# EAGLE board programmer shield (EAGLE 7.3.0)
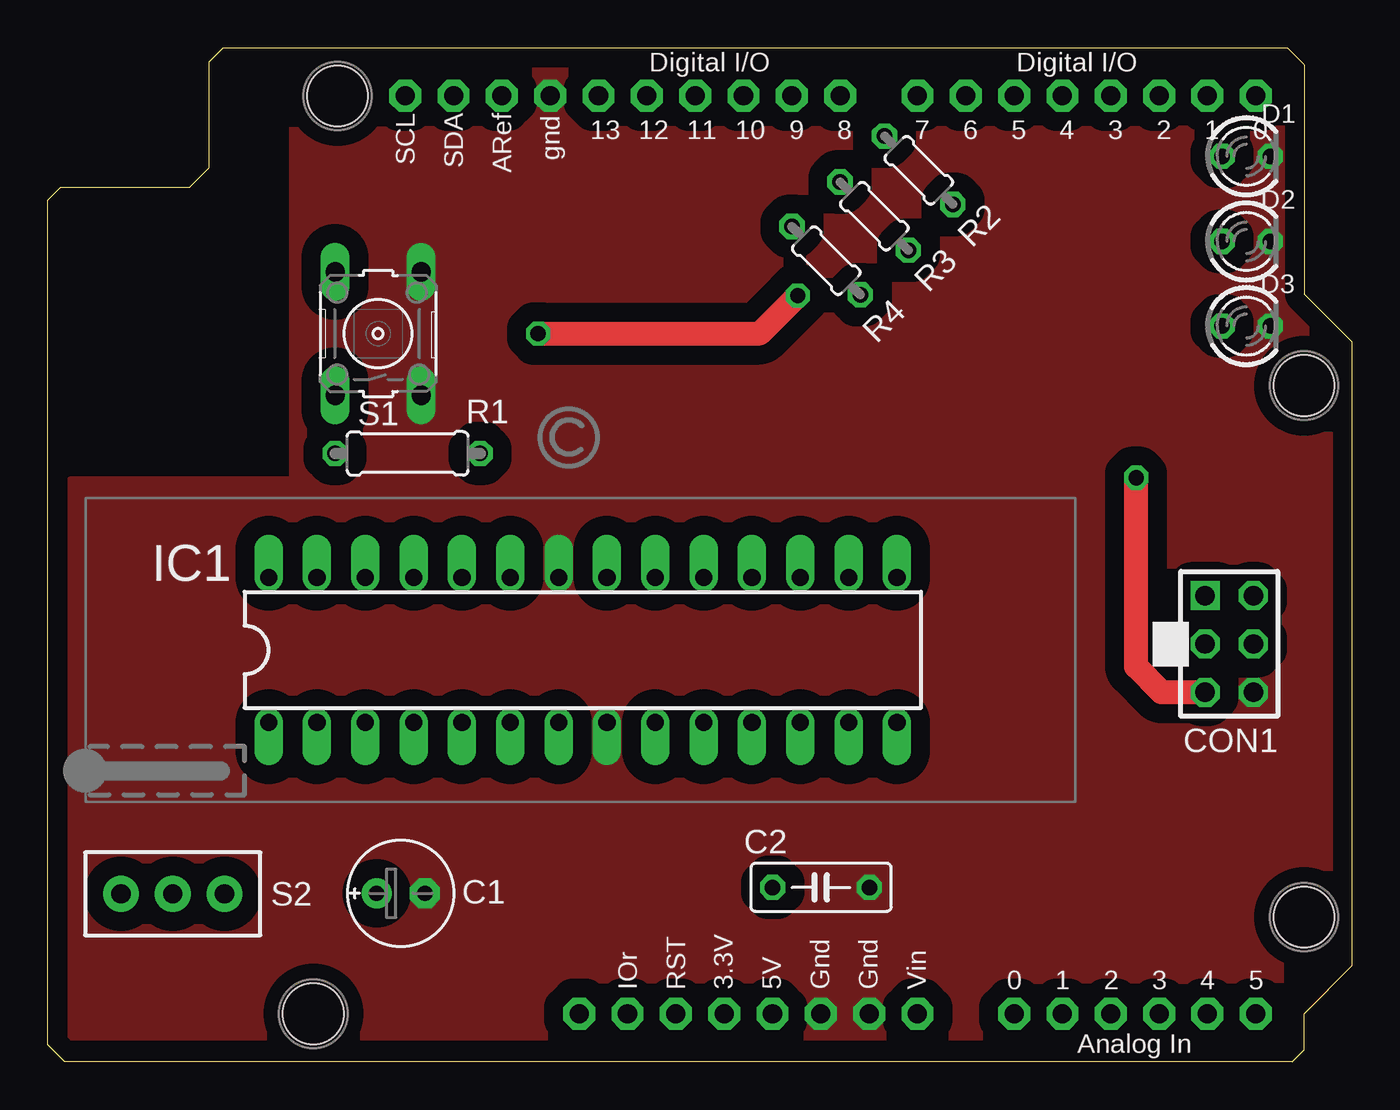
[diagram p0: board, top side]
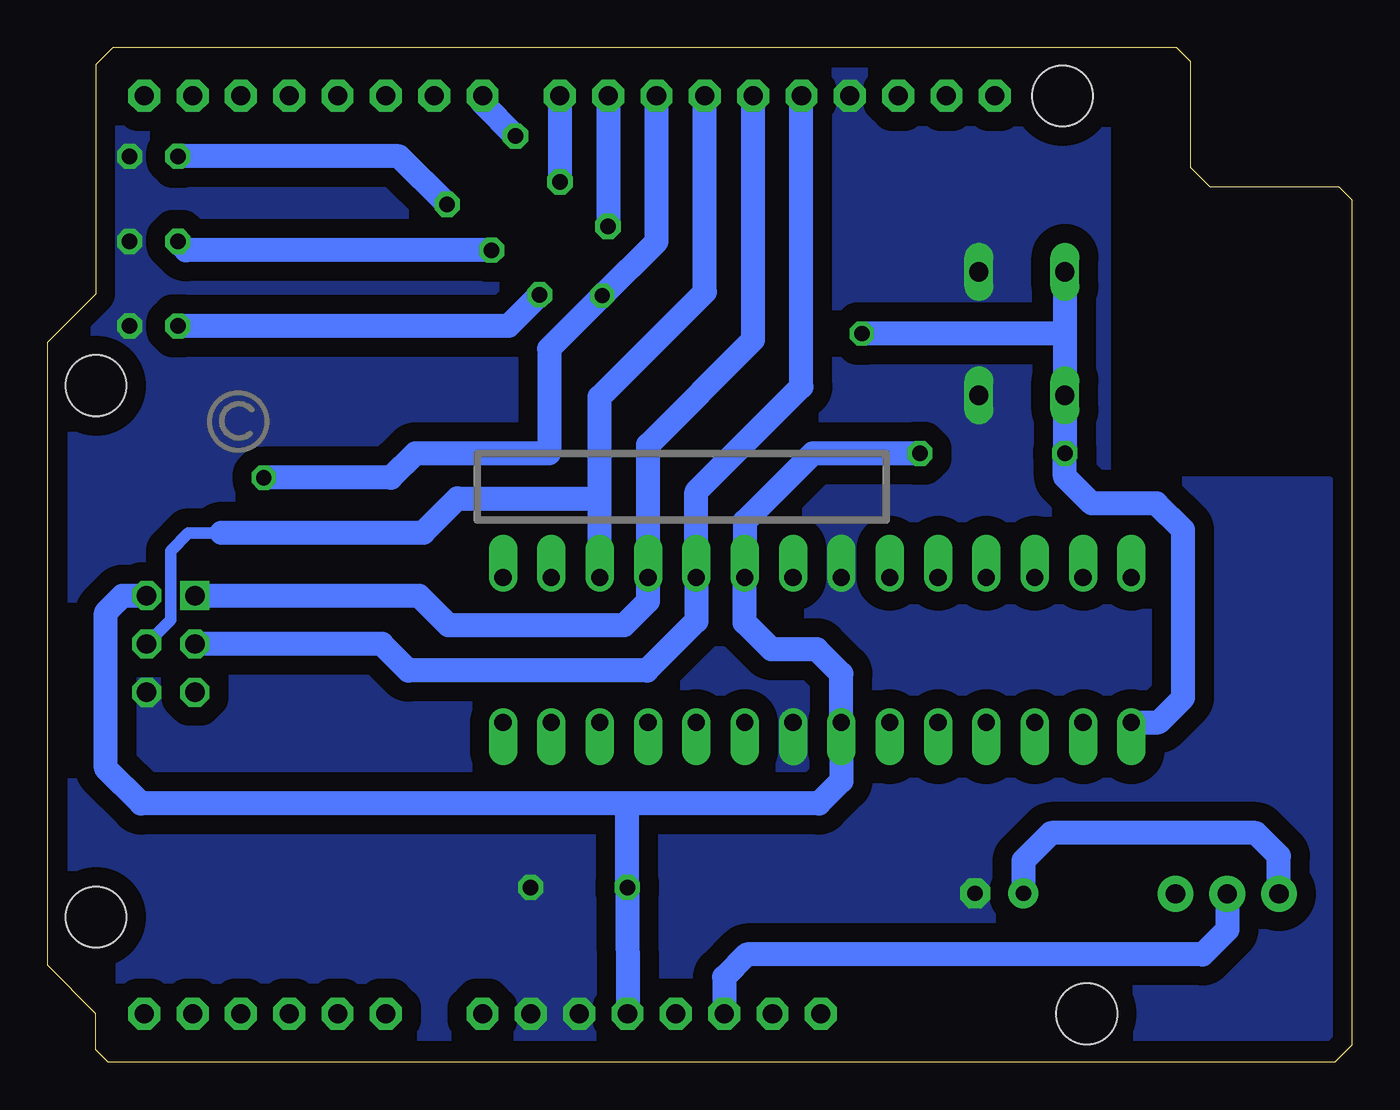
[diagram p1: board, bottom side, seen from below]

Size 68.58 x 53.34 mm. Coordinates in mm from the lower left corner, seen from the top.
Copper layers (1*16): Top 0.035mm / dielectric 1.5mm / Bottom 0.035mm
Design rules "ccc - AllPCB(prototyping)": minimum track width 16mil, minimum drill 0.4mm, track to track 6mil, track to pad 6mil, pad to pad 6mil, via to via 6mil, smd to smd 6mil, copper to edge 40mil, drill to drill 8mil, minimum pad ring 10mil, minimum via ring 8mil, stop-mask expansion 4mil, vias tented up to drill 0mil, thermal gap 10mil

## Footprints (pad centres in the part's own frame; a part is rotated, then mirrored left to right if it is on the bottom)
E2,5-6E = drill 0.813 pad 1.575: + -1.27,0 | drill 0.813 pad 1.575 octagon: - 1.27,0
C050-025X075 = drill 0.813 octagon: 1 -2.54,0; 2 2.54,0
AVR-ISP-6 = drill 1.016 square: 1 -2.54,-1.27 | drill 1.016 octagon: 2 -2.54,1.27; 3 0,-1.27; 4 0,1.27; 5 2.54,-1.27; 6 2.54,1.27
LED3MM = drill 0.813 octagon: A -1.27,0; K 1.27,0
DIL28-3-ZIF_NARROW = drill 0.9 pad 1.5 offset: 1 -16.51,-3.81; 2 -13.97,-3.81; 3 -11.43,-3.81; 4 -8.89,-3.81; 5 -6.35,-3.81; 6 -3.81,-3.81; 7 -1.27,-3.81; 8 1.27,-3.81; 9 3.81,-3.81; 10 6.35,-3.81; 11 8.89,-3.81; 12 11.43,-3.81; 13 13.97,-3.81; 14 16.51,-3.81; 15 16.51,3.81; 16 13.97,3.81; 17 11.43,3.81; 18 8.89,3.81; 19 6.35,3.81; 20 3.81,3.81; 21 1.27,3.81; 22 -1.27,3.81; 23 -3.81,3.81; 24 -6.35,3.81; 25 -8.89,3.81; 26 -11.43,3.81; 27 -13.97,3.81; 28 -16.51,3.81
0207/7 = drill 0.813 octagon: 1 -3.81,0; 2 3.81,0
0204/5 = drill 0.813 octagon: 1 -2.54,0; 2 2.54,0
B3F-10XX = drill 1.016 long: 1 -3.251,2.261; 2 3.251,2.261; 3 -3.251,-2.261; 4 3.251,-2.261
MINI_SPDT_SWITCH-9.0X4.0MM = drill 1.016 pad 1.88: 1 2.718,0; 2 0,0; 3 -2.718,0
ARDUINO-R3 = drill 1 pad 1.676 octagon: 3V 35.56,2.54; 5V 38.1,2.54; A0 50.8,2.54; A1 53.34,2.54; A2 55.88,2.54; A3 58.42,2.54; A4 60.96,2.54; A5 63.5,2.54; AREF 23.876,50.8; D0 63.5,50.8; D1 60.96,50.8; D2 58.42,50.8; D3 55.88,50.8; D4 53.34,50.8; D5 50.8,50.8; D6 48.26,50.8; D7 45.72,50.8; D8 41.656,50.8; D9 39.116,50.8; D10 36.576,50.8; D11 34.036,50.8; D12 31.496,50.8; D13 28.956,50.8; GND 26.416,50.8; GND1 43.18,2.54; GND2 40.64,2.54; IOREF 30.48,2.54; RESERVED 27.94,2.54; RESET 33.02,2.54; SCL 18.796,50.8; SDA 21.336,50.8; VIN 45.72,2.54 | hole 3.2: 15.24,50.8; 66.04,7.62; 13.97,2.54; 66.04,35.56

## Placement (x,y rotation side)
C1  10µF/16V  [E2,5-6E]  18.56,8.87 0 top
C2  100nF  [C050-025X075]  40.65,9.18 180 top
CON1  ICSP  [AVR-ISP-6]  62.11,21.98 270 top
D1  Yellow - programming  [LED3MM]  63,47.62 0 top
D2  Red - error  [LED3MM]  63,43.15 0 top
D3  Green - ISP running  [LED3MM]  63,38.7 0 top
IC1  Atmega88/168/328  [DIL28-3-ZIF_NARROW]  28.13,21.67 0 top
R1  10k  [0207/7]  18.92,32 0 top
R2  470  [0204/5]  45.78,46.89 315 top
R3  470  [0204/5]  43.45,44.48 315 top
R4  470  [0204/5]  40.92,42.14 315 top
S1  Reset  [B3F-10XX]  17.38,38.3 90 top
S2  prog-mode  [MINI_SPDT_SWITCH-9.0X4.0MM]  6.58,8.84 0 top
U$1  Arduino Uno  [ARDUINO-R3]  0,0 0 top
U$2  [COPYRIGHT-LOGO-3-B]  58.56,33.68 0 top
U$3  [3X-LOGO-10-B]  0.13,34.95 0 top
U$4  [COPYRIGHT-LOGO-3-T]  27.38,32.83 0 top
U$5  [3X-LOGO-5-B]  55.12,11.43 0 top
U$6  [3X-LOGO-5-T]  26.85,7.14 0 top
U$7  [3X-LOGO-10-B]  12.9,34.94 0 bottom

## Library data of the parts
C1 C2 = rcl
CON1 = avr-4
D1-D3 = led
IC1 S2 U$1 = ccr-lib
R1-R4 = resistor
S1 = switch-omron; MPN: B3F-1000; OC_FARNELL: 176432; OC_NEWARK: 36M3542
U$2-U$7 = base3clock

## Nets
3V3: U$1.3V
+UB: C2.2 CON1.2 IC1.7 IC1.20 R1.2 U$1.5V
GND: C1.- C2.1 CON1.6 D1.K D2.K D3.K IC1.8 IC1.22 S1.3 S1.4 U$1.GND U$1.GND1 U$1.GND2
MISO: CON1.1 IC1.18 U$1.D12
MOSI: CON1.4 IC1.17 U$1.D11
N$1: C1.+ S2.3
N$2: R4.1 U$1.D9
N$3: R2.1 U$1.D7
N$4: R3.1 U$1.D8
N$5: D1.A R2.2
N$6: D2.A R3.2
N$7: D3.A R4.2
N$19: S2.2 U$1.RESET
RESET: CON1.5 IC1.1 R1.1 S1.1 S1.2 U$1.D10
SCK: CON1.3 IC1.19 U$1.D13
VIN: U$1.VIN

## Tracks (layer width: path | path; a pad name or v marks a point on that pad's centre or on a via)
+UB
  Bottom 1.27: U$1.5V C2.2 38.11,13.59 | 38.11,13.59 28.05,13.59 26.86,14.78 IC1.7 26.86,20.4 28.15,21.69 30.53,21.69 31.94,23.1 IC1.20 31.94,28.42 28.36,32 R1.2 | 38.11,13.59 63.67,13.59 65.52,15.44 65.52,23.63 64.63,24.52 CON1.2
GND
  pour Bottom (isolate 1, no thermals): 64.7,6 64.7,1.4 1.25,1.4 1.25,30.5 13,30.5 13,52 65.2,52 65.2,39.75 67.5,37.01 67.5,6
  pour Top (isolate 1, no thermals): 64.69,6.03 64.69,1.43 1.24,1.43 1.24,30.5 13,30.5 13,52 65.19,52 65.19,39.78 67.49,37.03 67.49,6.03
MISO
  Bottom 1.27: U$1.D12 31.5,37.97 37.02,32.45 IC1.18 37.02,24.23 38.28,22.97 47.51,22.97 49.06,24.52 CON1.1
MOSI
  Bottom 0.61: CON1.4 62.12,23.24 62.12,26.88 61.18,27.81 59.45,27.81 59.45,27.84
  Bottom 1.27: IC1.17 39.56,29.63 | 39.56,29.63 39.56,34.96 34.04,40.49 U$1.D11 | 59.45,27.84 48.83,27.84 47.04,29.63 39.56,29.63
N$1
  Bottom 1.27: S2.3 3.86,10.83 5.07,12.04 15.83,12.04 17.29,10.58 C1.+
N$2
  Bottom 1.27: U$1.D9 R4.1
N$3
  Bottom 1.27: R2.1 45.72,50.42 U$1.D7
N$4
  Bottom 1.27: U$1.D8 R3.1
N$5
  Bottom 1.27: R2.2 50.11,47.62 D1.A
N$6
  Bottom 1.27: R3.2 61.29,42.68 D2.A
N$7
  Bottom 1.27: R4.2 44.36,38.7 D3.A
N$19
  Bottom 1.27: S2.2 6.58,6.95 7.88,5.65 31.83,5.65 33.02,4.46 U$1.RESET
N$22  (via drill 1 pad 1.68)
  other vias: 21.34,50.8
N$23  (via drill 1 pad 1.68)
  other vias: 18.8,50.8
RESET  (via drill 0.8 pad 1.27)
  Top 1.27: CON1.5 58.56,19.44 57.21,20.79 v57.21,30.72 | v25.78,38.3 37.42,38.3 v39.42,40.3
  Bottom 1.27: IC1.1 10.19,17.86 8.9,19.14 8.9,27.97 10.3,29.38 13.7,29.38 15.11,30.78 R1.1 S1.1 15.12,38.3 | U$1.D10 36.58,43.14 v39.42,40.3 42.22,37.5 42.22,32 49.25,32 50.53,30.72 v57.21,30.72 | 15.12,38.3 v25.78,38.3 | S1.2 15.12,38.3
SCK
  Bottom 1.27: U$1.D13 28.96,35.51 34.48,29.98 IC1.19 34.48,23.19 37.08,20.59 49.62,20.59 51.02,21.98 CON1.3

## Text on the board
tDocu: SCK | MISO | MOSI | RESET | uploading | RESET | Error! | Designed by the / Nostradomus Engineering Team | ISPrunning | Carl | 2017/007 V01 | In Circuit System / Programmer socket | mode | Atmega88/168/328 / programmer shield | PROG-RUN
bDocu: Designed by the / Nostradomus Engineering Team | 2017/007 V01 | Carl | ser. | Atmega88/168/328 / programmer shield